# Altium PCB PCB1.PcbDoc
Units mm, origin at the board's own origin, x right, y up, seen from the top; angles counter-clockwise.
Board outline 100 x 62 mm, 2 copper layers (Top Layer, Bottom Layer); 8 components, 11 nets, 49 pads, 0 vias.
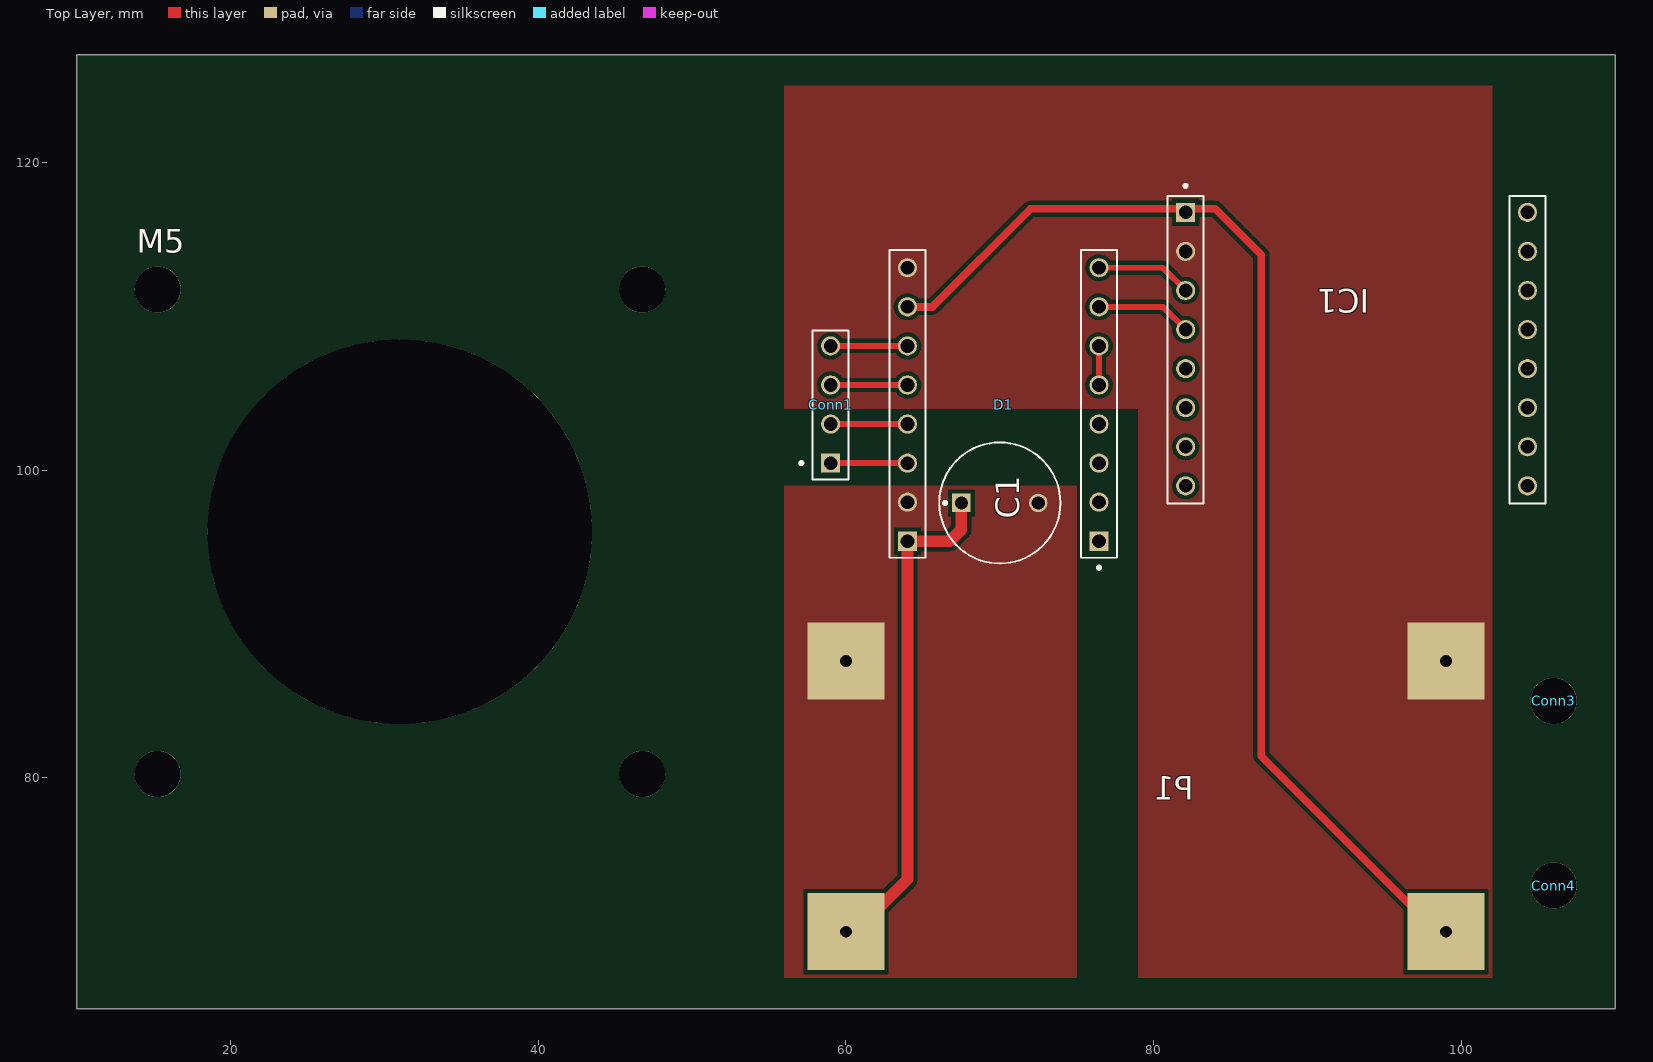
[diagram p0: Top Layer view]
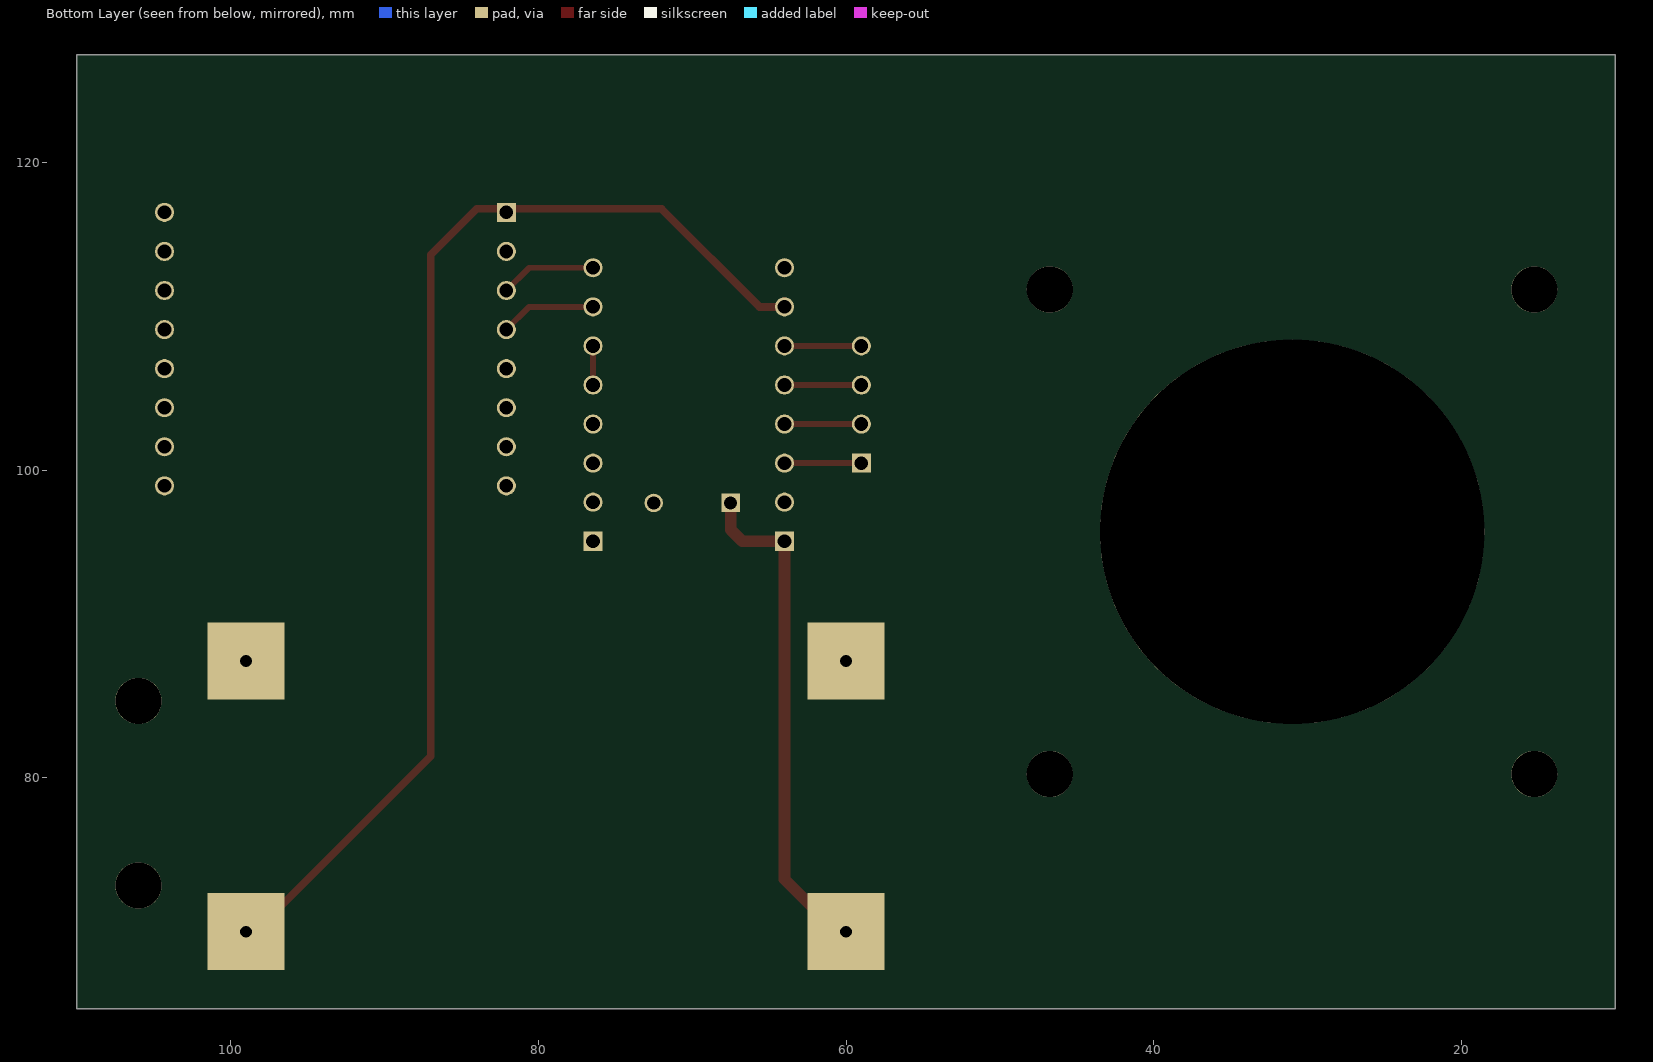
[diagram p1: Bottom Layer view, seen from below]

## Layer stack, top to bottom
Top Solder: solder mask 0.0102, Solder Resist, Dk 3.5
Top Layer: signal copper 0.0356
Dielectric 1: dielectric 0.32, FR-4, Dk 4.8
Bottom Layer: signal copper 0.0356
Bottom Solder: solder mask 0.0102, Solder Resist, Dk 3.5

## Board outline
10,127 110,127 110,65 10,65

## Design rules (kind name [scope] priority, off if disabled: settings)
Clearance Clearance_1 [All] p1: gap=0.254 ignorepadtopadclearanceinfootprint=FALSE
Clearance [All] p2: gap=0.254 ignorepadtopadclearanceinfootprint=FALSE
PlaneConnect [All] p1: planeconnectstyle=Direct reliefexpansion=0.508 reliefentries=4 reliefconductorwidth=0.254 reliefairgap=0.254
PolygonConnect [All] p1: connectstyle=Direct reliefconductorwidth=0.254 reliefentries=4 polygonreliefangle="90 Angle" airgapwidth=0.254
RoutingVias [All] p1: holewidth=0.711 width=1.27 viastyle="Through Hole" minholewidth=0.711 minwidth=1.27 maxholewidth=0.711 maxwidth=1.27
SolderMaskExpansion [All] p1: expansion=0.102 istentingtop=FALSE
SupplyNets "Schematic Supply Nets_4" [InNet('GND_12V')] p1: voltage=0.000
SupplyNets "Schematic Supply Nets_3" [InNet('GND')] p2: voltage=0.000
SupplyNets "Schematic Supply Nets_2" [InNet('12V')] p3: voltage=0.000
SupplyNets "Schematic Supply Nets" [InNet('5V')] p4: voltage=0.000
Width [All] p1: maxlimit=1.016 minlimit=0.381 preferedwidth=0.381 minimp=50.000000 maximp=50.000000 favimp=50.000000
29 further rules are at their usual default settings.

## Components (designator, comment, footprint, x,y, rotation, side; value= is the part's Value field where it differs from the comment)
C1 "ElcoCap" ElcCap 70,98 r0 top
Conn1 "4Pin Connector" "4Pin Connector" 57.73,87.506 r90 top
Conn3 "MountHole" MountHOle 104.857,85 r270 top
Conn4 "MountHole" MountHOle 104.857,73 r270 top
D1 "Driver" DiverSockel 76.446,95.38 r90 top
IC1 "SockelESP8266" "ESP8266 Sockel" 93,108 r270 top
M5 "Motor Mount" "Motor Mount" 15.25,80.25 r0 top
P1 "StepDownConverter" StepDownConverter 58,68 r90 top

## Footprints (in the part's own frame and the unit in brackets; to place one, negate y for a bottom-side part, rotate by r counter-clockwise, add the part's x,y. Pads: shape width x height; smd on the part's side, far side on the other; paste and mask are expansions set on the pad)
"4Pin Connector" [mm]
  rect 1.24x1.24 hole 0.89: 1(12.954,-1.27)
  round 1.24 hole 0.89: 2(15.494,-1.27) 3(18.034,-1.27) 4(20.574,-1.27)
  silkscreen extent 11.88,-2.44 21.59,0.73
DiverSockel [mm]
  rect 1.24x1.24 hole 0.89: 1(0,0) 9(0,12.446)
  round 1.24 hole 0.89: 2(2.54,0) 3(5.08,0) 4(7.62,0) 5(10.16,0) 6(12.7,0) 7(15.24,0) 8(17.78,0) 10(2.54,12.446) 11(5.08,12.446) 12(7.62,12.446) 13(10.16,12.446) 14(12.7,12.446) 15(15.24,12.446) 16(17.78,12.446)
  silkscreen extent -1.82,-1.17 18.92,13.62, body extent -1.52,-1.42 19.3,13.82, height 18.42
ElcCap [mm]
  rect 1.2x1.2 hole 0.85: 1(-2.5,-0.127)
  round 1.2 hole 0.85: 2(2.5,-0.127)
  silkscreen extent -3.94,-4.06 3.94,3.81
"ESP8266 Sockel" [mm]
  rect 1.24x1.24 hole 0.89: 1(-8.763,-10.922)
  round 1.24 hole 0.89: 2(-6.223,-10.922) 3(-3.683,-10.922) 4(-1.143,-10.922) 5(1.397,-10.922) 6(3.937,-10.922) 7(6.477,-10.922) 8(9.017,-10.922) 9(-8.763,11.303) 10(-6.223,11.303) 11(-3.683,11.303) 12(-1.143,11.303) 13(1.397,11.303) 14(3.937,11.303) 15(6.477,11.303) 16(9.017,11.303)
  silkscreen extent -10.58,-12.09 10.16,12.47, body extent -18.15,-12.9 16.15,12.9, height 15.94
"Motor Mount" [mm]
  round 3 hole 3: 1(0,0) 1(0,31.5) 1(31.5,0) 1(31.5,31.5)
  round 25 hole 25: 1(15.75,15.75)
  body extent -4.7,-6.16 37.6,36.14, height 39
MountHOle [mm]
  round 3 hole 3: 1(0,1.143)
StepDownConverter [mm]
  rect 5x5 hole 0.762: 1(2,-2) 2(19.59,-2) 3(2,-41) 4(19.59,-41)
  body extent 0,-43.18 21.59,0, height 13.21

## Part data
IC1: "ESP8266 D1 mini Sockel"

## Nets (pads, with @x,y where several pads share a name; then routed paths per layer and width w, separated by ;. In a path a pad name is that pad's centre, name@x,y a point inside that pad or via, vN(x,y) a via of type N, cw(c..) or ccw(c..) an arc to the next point about the centre after c; other vN are vias at no path point)
5V: D1.15 IC1.1 P1.3 | length 77
  Top Layer w0.508: D1.15@64,111 D1.15 65.62,110.62 72,117 81.841,117 IC1.1 82.315,117 84,117 87,114 87,81.41 P1.3@99,69.41
12V: C1.1 D1.9 P1.1 | length 33.2
  Top Layer w0.762: P1.1@60,69.41 64,73.41 D1.9 66.75,95.38 67.5,96.13 C1.1
DIR: D1.8 IC1.3 | length 6.2
  Top Layer w0.381: D1.8 80.601,113.16 IC1.3
GND: D1.16 IC1.2 P1.4
GND_12V: C1.2 D1.10 P1.2
NetConn1_1: Conn1.1 D1.11 | length 5
  Top Layer w0.381: Conn1.1 D1.11
NetConn1_2: Conn1.2 D1.12 | length 5
  Top Layer w0.381: Conn1.2 D1.12
NetConn1_3: Conn1.3 D1.13 | length 5
  Top Layer w0.381: Conn1.3 D1.13
NetConn1_4: Conn1.4 D1.14 | length 5
  Top Layer w0.381: Conn1.4 D1.14
NetD1_5: D1.5 D1.6 | length 2.5
  Top Layer w0.381: D1.5 D1.6
STEP: D1.7 IC1.4 | length 6.2
  Top Layer w0.381: D1.7 80.601,110.62 IC1.4
pads on no net: Conn3.1 Conn4.1 D1.1 D1.2 D1.3 D1.4 IC1.5 IC1.6 IC1.7 IC1.8 IC1.9 IC1.10 IC1.11 IC1.12 IC1.13 IC1.14 IC1.15 IC1.16 M5.1

## Polygon pours and split planes (outlines as drawn)
GND on Top Layer "Top Layer-GND" (solid, pour order 3): 79,67 102,67 102,125 56,125 56,104 79,104
GND_12V on Top Layer "NONET_L-01_P-001" (solid, pour order 0): 56,99 56,67 75,67 75,99